# Altium PCB EECS430PhasedArray.PcbDoc (part 2 of 2)
Units mil, origin at the board's own origin, x right, y up, seen from the top; angles counter-clockwise.
Board outline 6900 x 8200 mil, 2 copper layers (Top Layer, Bottom Layer), stack 62.8 mil thick; 97 components, 54 nets, 335 pads, 174 vias.
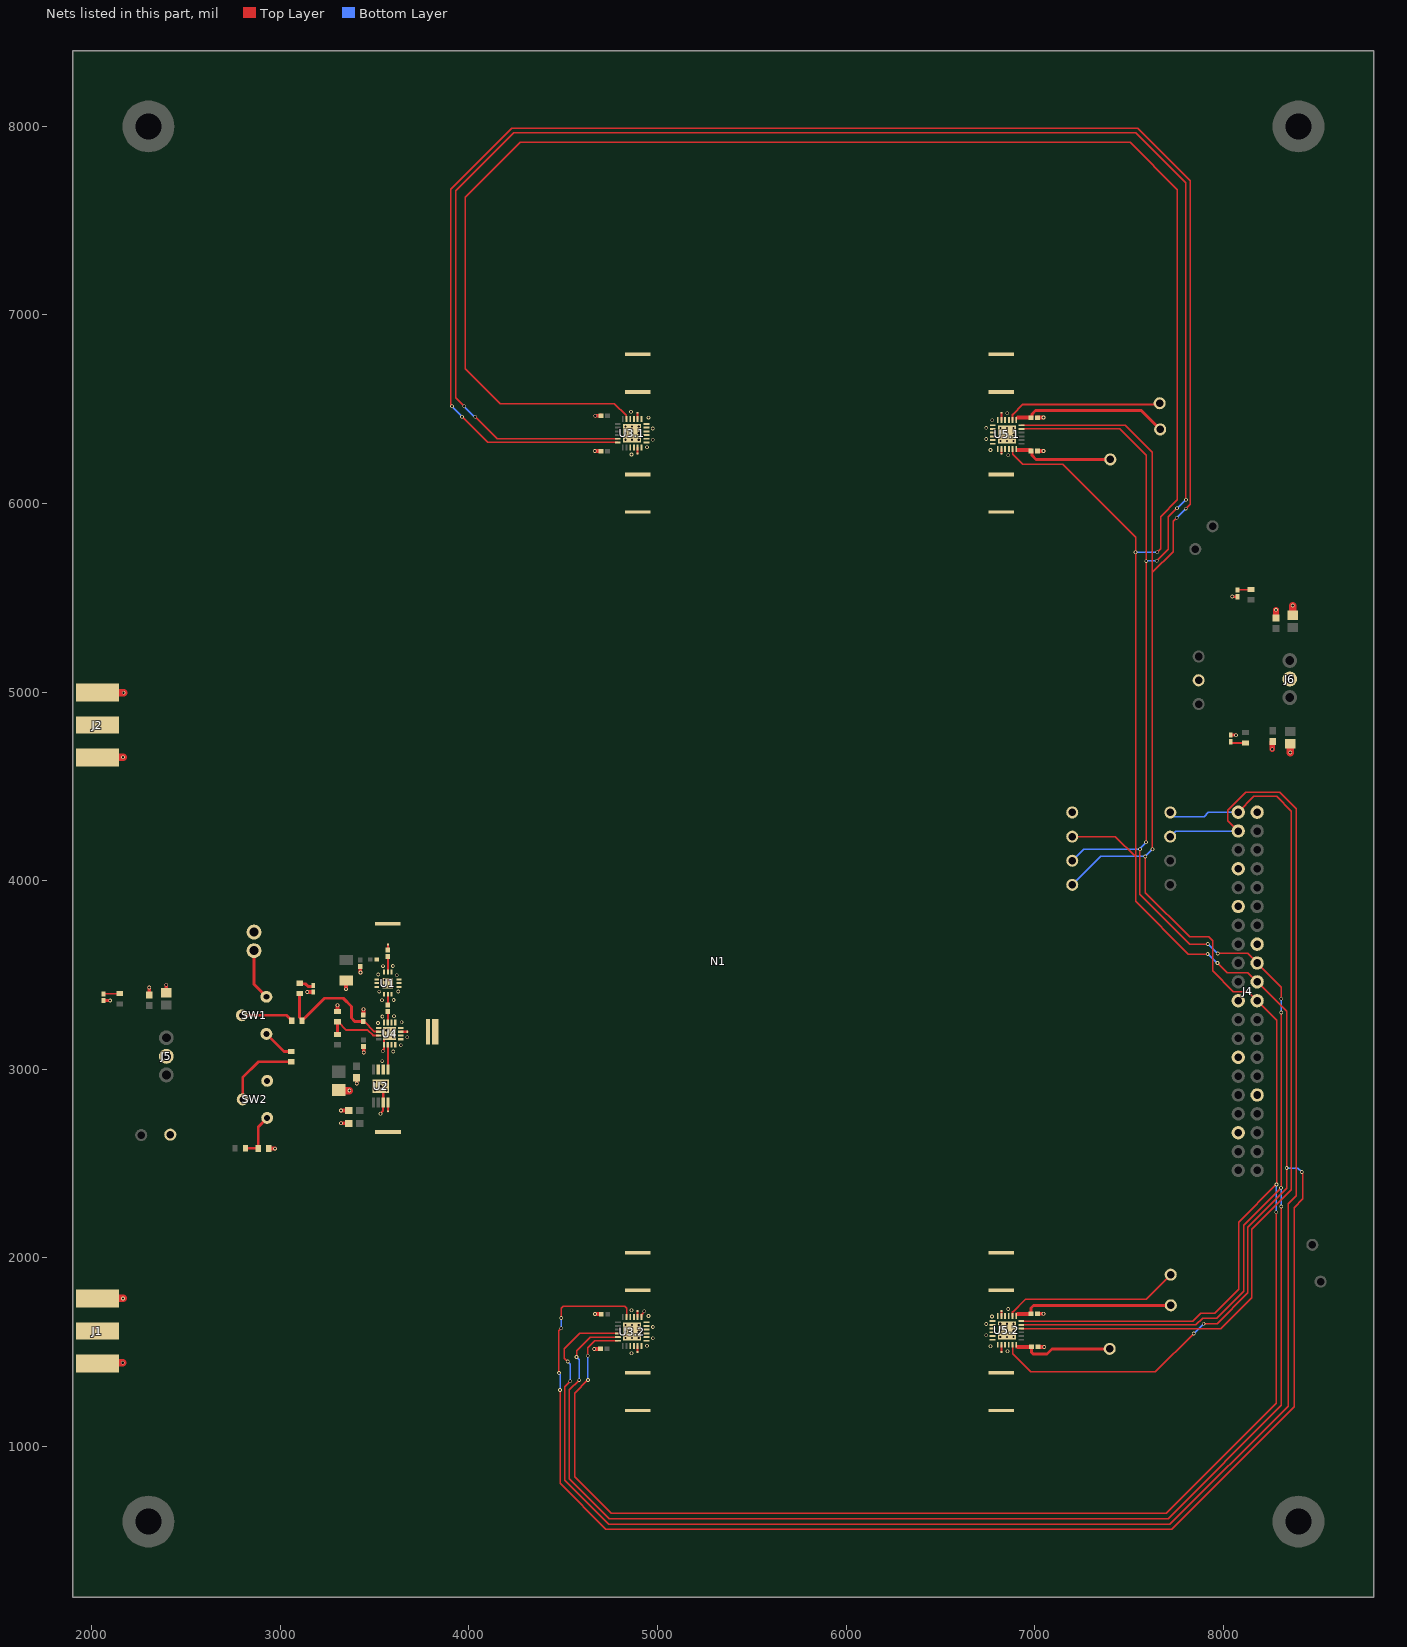
[diagram p2: the nets of this part, all layers, seen from the top]

## Via types
v1: diameter 19.68, hole 11.81, Top Layer to Bottom Layer, 174 vias

## Nets (pads, with @x,y where several pads share a name; then routed paths per layer and width w, separated by ;. In a path a pad name is that pad's centre, name@x,y a point inside that pad or via, vN(x,y) a via of type N, cw(c..) or ccw(c..) an arc to the next point about the centre after c; other vN are vias at no path point) (continued)
CS3: CS3.1 J4.38 U3.2.22 | length 9364.6
  Top Layer w7: v1(4523.86,1448.9) 4505.16,1467.6 4505.16,1516.81 4586.85,1598.5 U3.2.22@4789.61,1598.5 ; v1(4537.64,1344.57) 4509.64,1316.56 4509.64,818.67 4742.56,585.75 7717.52,585.75 8344.88,1213.11 8344.88,2287.2 8387.01,2329.33 8387.01,4382.09 8299.57,4469.53 8121.17,4469.53 8024.96,4373.32 8024.96,4318.15 J4.38@8080.47,4262.64
  Bottom Layer w7: v1(4523.86,1448.9) 4537.64,1435.12 v1(4537.64,1344.57) ; CS3.1@7719.37,4233.06 7748.95,4262.64 J4.38@8080.47,4262.64
CS4: CS4.1 J4.40 U5.2.22 | length 4685.3
  Top Layer w7: U5.2.22@6929.49,1623.73 7988.73,1623.73 8152.56,1787.56 8152.56,2150.28 8362.56,2360.28 8362.56,4367.17 8283.82,4445.91 8163.74,4445.91 J4.40@8080.47,4362.64
  Bottom Layer w7: CS4.1@7720.51,4361.26 7742.32,4339.45 7898.77,4339.45 7921.95,4362.64 J4.40@8080.47,4362.64
GND: C1.2 C2.2 C3.2 C4.2 C5.2 C6.2 C9.2 C10.2 C11.2 C12.2 C13.1.2 C13.2.2 C14.1.2 C14.2.2 C15.2 C16.2 C17.1.2 C17.2.2 C18.1.2 C18.2.2 C19.2 C20.2 D1.1 D2.1 D3.1 D4.1 GND.1 J1.2 J1.3 J2.2 J2.3 J3.2 J4.6 J4.9 J4.14 J4.20 J4.25 J4.30 J4.34 J4.39 J5.2 J6.2 R4.1 R6.1 SW2.2 U1.1 U1.3 U1.4 U1.5 U1.6 U1.7 U1.9 U1.10 U1.11 U1.12 U1.13 U2.3 U2.6 U2.7 U2.9 U3.1.3 U3.1.4 U3.1.6 U3.1.7 U3.1.8 U3.1.9 U3.1.10 U3.1.11 U3.1.12 U3.1.13 U3.1.15 U3.1.16 U3.1.25 U3.2.3 U3.2.4 U3.2.6 U3.2.7 U3.2.8 U3.2.9 U3.2.10 U3.2.11 U3.2.12 U3.2.13 U3.2.15 U3.2.16 U3.2.25 U4.1 U4.3 U4.4 U4.5 U4.6 U4.8 U4.9 U4.10 U4.12 U4.13 U4.17 U5.1.3 U5.1.4 U5.1.6 U5.1.7 U5.1.8 U5.1.9 U5.1.10 U5.1.11 U5.1.12 U5.1.13 U5.1.15 U5.1.16 U5.1.25 U5.2.3 U5.2.4 U5.2.6 U5.2.7 U5.2.8 U5.2.9 U5.2.10 U5.2.11 U5.2.12 U5.2.13 U5.2.15 U5.2.16 U5.2.25 | length 1854.4
  Top Layer w10: U3.2.13@4914.61,1684.13 4914.61,1694.8 4915.59,1695.79 4915.59,1698.16 4929.96,1712.53 v1(4929.96,1715.15)
  Top Layer w11: v1@3529.08,2763.31 v1(3531.08,2763.31) 3531.08,2765.66 3544.08,2778.66 3544.08,2820.72 U2.3@3545.38,2822.02 ; v1(3543.08,3095.31) 3543.08,3097.66 3549.94,3104.52 3549.94,3128.73 3550.75,3129.55 3550.75,3159.07 3550.92,3159.25 v1(3561.87,3170.2)
  Top Layer w15: D1.1@2062.36,3363.23 2062.9,3363.77 2096.54,3363.77 v1(2097.08,3364.31) ; v1(3532.59,2909.62) 3545.38,2896.83 U2.3@3545.38,2822.02 ; D2.1@8040.08,4772.02 8040.44,4771.67 8067.72,4771.67 v1(8068.08,4771.31) ; v1(8048.08,5506.31) 8048.75,5505.63 8075.47,5505.63 D3.1@8076.14,5504.96
  Top Layer w20: v1(2304.08,3433.31) 2304.49,3432.9 C20.2@2304.49,3393.82 ; C19.2@2395.04,3404.6 2395.08,3404.64 v1(2395.08,3447.31) ; R4.1@2938.08,2579.31 2939.08,2578.31 v1(2971.08,2578.31) ; v1(3143,3409) 3173.84,3409 3174,3408.84 D4.1@3174,3408.28 ; R6.1@3302.89,3306.29 3303.08,3306.48 v1(3303.08,3338.31) ; v1(3321.08,2712.31) C12.2@3362.55,2712.31 ; v1(3321.08,2780.31) C10.2@3362.55,2780.31 ; v1(3348.08,3424.31) 3348.08,3468.17 C5.2@3350.08,3470.17 ; C11.2@3404.67,2955.05 3404.88,2954.84 v1(3404.88,2923.27) ; C6.2@3424.08,3544.98 3424.08,3513.31 v1(3425.08,3512.31) ; C16.2@3440.11,3287.21 3441.08,3288.18 v1(3441.08,3317.31) ; C15.2@3441.09,3119.69 3442.08,3118.7 v1(3442.08,3088.31) ; v1(4664.96,1515.15) 4696.21,1515.15 C14.2.2@4697.87,1516.81 ; v1(4667.88,6278.02) 4698.91,6278.02 C14.1.2@4699.76,6277.17 ; v1(4668.96,1701.15) 4701.53,1701.15 C13.2.2@4701.81,1700.87 ; v1(4669.88,6465.02) 4698.65,6465.02 C13.1.2@4699.76,6466.14 ; C17.1.2@7015.51,6278.15 7018.19,6278.15 7018.5,6277.83 7047.91,6277.83 v1(7048,6277.74) ; C18.1.2@7015.51,6455.31 7015.94,6455.74 v1(7048,6455.74) ; C18.2.2@7015.59,1701.85 7015.89,1702.15 v1(7046.96,1702.15) ; C17.2.2@7018.94,1526.65 7021.81,1526.65 7021.93,1526.54 7050.72,1526.54 v1(7051,1526.26)
  Top Layer w30: v1(8261.15,4696.79) 8261.15,4735.17 C2.2@8263.15,4737.17 ; C4.2@8280.23,5393.27 v1(8280.23,5435.65)
  Top Layer w40: J1.3@2030.08,1438.31 2034.72,1442.95 v1(2163.74,1442.95) ; J1.2@2030.08,1783.31 2030.08,1783.5 v1(2165.71,1783.5) ; J2.3@2030.08,4652.03 2030.08,4653.58 v1(2165.71,4653.58) ; J2.2@2030.08,4997.03 2168.66,4997.03 v1(2168.66,4996.1) ; C9.2@3309.2,2889.11 3312,2886.31 v1(3366.08,2886.31) ; v1(8355.65,4678.88) 8355.65,4724.37 C1.2@8356.65,4725.37 ; C3.2@8369.33,5407.08 v1(8369.33,5458.57)
  other v1: 4862.44,1493.19 6856.96,1503.15 6765.98,1530.59 4944.13,1532.56 4830.39,1573.35 4865.39,1573.35 4900.39,1573.35 4975.71,1572.91 6818.7,1578.89 6853.7,1578.89 6888.7,1578.89 6743.27,1588.66 4830.39,1608.35 4865.39,1608.35 4900.39,1608.35 6818.7,1613.89 6853.7,1613.89 6888.7,1613.89 4975.71,1631.97 4830.39,1643.35 4865.39,1643.35 4900.39,1643.35 6743.27,1647.72 6818.7,1648.89 6853.7,1648.89 6888.7,1648.89 6774.84,1688.07 4952.99,1690.04 4862.44,1721.54 6860.96,1727.15 3502.59,2887.62 3562.59,2887.62 3502.59,2931.62 3562.59,2931.62 3540.71,3042.36 3599.08,3093.31 3639.13,3126.02 3672.6,3169.33 3597.87,3170.2 3561.87,3206.2 3597.87,3206.2 3518.07,3244.13 3643.07,3249.06 3541.08,3279.31 3602.72,3280.55 3538.74,3365.2 3600.75,3366.18 3525.06,3410.92 3625.35,3411.46 3553.53,3439.41 3586.53,3439.41 3553.53,3472.41 3586.53,3472.41 3617.48,3498.07 3519.06,3502.01 3544.65,3546.3 3596.81,3547.28 6860.88,6256.02 4862.88,6260.02 6766.48,6283.81 4944.06,6297.83 6819.04,6330.81 6854.04,6330.81 6889.04,6330.81 4830.31,6337.64 4865.31,6337.64 4900.31,6337.64 4975.63,6338.19 6743.77,6341.88 6819.04,6365.81 6854.04,6365.81 6889.04,6365.81 4830.31,6372.64 4865.31,6372.64 4900.31,6372.64 4975.63,6397.24 6743.77,6400.94 6819.04,6400.81 6854.04,6400.81 6889.04,6400.81 4830.31,6407.64 4865.31,6407.64 4900.31,6407.64 6775.34,6441.29 4952.91,6455.31 6854.88,6478.02 4859.88,6486.02
MISO: J4.21 MISO.1 U3.1.17 U3.2.17 U5.1.17 U5.2.17 | length 22229.2
  Top Layer w7: v1(4477.58,1388.88) 4477.58,1613.46 v1(4489.41,1625.3) ; v1(4483.5,1298.31) 4483.5,803.54 4726.63,560.41 7728.72,560.41 8376.38,1208.07 8376.38,2265.79 8423.07,2312.48 8423.07,2444.95 8416.69,2451.33 v1(8416.69,2454.76) ; v1(4489.41,1679.98) 4489.41,1730.39 4500.17,1741.15 4826.09,1741.15 4835.87,1731.38 U3.2.17@4835.87,1684.13 ; U3.1.17@4835.79,6448.43 4834.37,6449.85 4834.37,6466.92 4771.26,6530.02 4165.88,6530.02 3980.47,6715.43 3980.47,7623.62 4271.89,7915.04 7507.52,7915.04 7758.15,7664.41 7758.15,6018.66 7669.65,5930.16 7669.65,5760.51 v1(7650.59,5741.46) ; U5.2.17@6883.23,1538.1 6883.23,1490.12 6978.58,1394.76 7641.18,1394.76 v1(7844.02,1597.6) ; U5.1.17@6883.57,6290.02 6883.57,6261.98 6938.66,6206.89 7148.66,6206.89 7535.63,5819.92 v1(7535.63,5741.18) 7536.77,5740.04 7535.63,5738.9 7535.63,4126 ; MISO.1@7200,4233.2 7428.43,4233.2 7535.63,4126 ; v1(7896.67,1649.84) 7968.84,1649.84 8131.65,1812.65 8131.65,2161.85 8336.97,2367.17 v1(8336.97,2475.43) 8336.97,3306.14 J4.21@8180.47,3462.64 8132.04,3511.07 8021.8,3511.07 v1(7969.84,3563.03) ; v1(7918,3610) 7815.08,3610 7535.63,3889.45 7535.63,4126
  Bottom Layer w7: v1(4477.58,1388.88) 4477.58,1385.45 4483.35,1379.67 4483.35,1298.46 v1(4483.5,1298.31) ; v1(4489.41,1625.3) v1(4489.41,1679.98) ; v1(7535.63,5741.18) 7535.77,5741.32 7650.45,5741.32 v1(7650.59,5741.46) ; v1(7844.02,1597.6) 7844.43,1597.6 v1(7896.67,1649.84) ; v1(7918,3610) 7920.44,3610 7967.41,3563.03 v1(7969.84,3563.03) ; v1(8336.97,2475.43) 8396.02,2475.43 v1(8416.69,2454.76)
MOSI: J4.19 MOSI.1 U3.1.24 U3.2.24 U5.1.24 U5.2.24 | length 21900.4
  Top Layer w7: v1(3910.59,6515.14) 3910.59,6517.71 3902.72,6525.58 3902.72,7665.94 4227.6,7990.83 7547.87,7990.83 7826.14,7712.56 7826.14,5996.91 v1(7801.85,5972.61) ; v1(3963.74,6460.24) 4100.55,6323.43 U3.1.24@4789.53,6323.43 ; v1(4630.16,1479.41) 4630.16,1522.72 4666.57,1559.13 U3.2.24@4789.61,1559.13 ; v1(4631.14,1351.46) 4560.28,1280.59 4560.28,838.98 4755.5,643.76 7697.65,643.76 8281.89,1227.99 v1(8281.89,2241.3) ; U5.2.24@6929.49,1663.1 7839.6,1663.1 7881.5,1705 7957,1705 8083.46,1831.46 8083.46,2188.45 v1(8283.08,2388.07) ; U5.1.24@6929.83,6415.02 7480.49,6415.02 7625.13,6270.38 7625.13,5634.77 ; v1(7587.6,4128.11) 7587.6,3936.46 7823.19,3700.87 7924.13,3700.87 7944.25,3680.75 7944.25,3520.71 8053.5,3411.46 8131.65,3411.46 J4.19@8180.47,3362.64 8283.82,3259.29 v1@8283.82,2388.07 ; v1(7625.13,4165.99) 7625.13,5634.77 ; v1(7753.98,5924.09) 7735,5905.12 7735,5744.65 7625.13,5634.77
  Bottom Layer w7: v1(3910.59,6515.14) 3910.59,6514.26 3963.74,6461.11 v1(3963.74,6460.24) ; v1(4630.16,1479.41) 4630.65,1478.92 4630.65,1351.95 v1(4631.14,1351.46) ; MOSI.1@7200,3977.08 7351.03,4128.11 v1(7587.6,4128.11) 7587.6,4128.29 7625.13,4165.82 v1(7625.13,4165.99) ; v1(7753.98,5924.09) 7753.98,5924.42 7801.85,5972.29 v1(7801.85,5972.61) ; v1(8281.89,2241.3) 8283.08,2242.49 v1(8283.08,2388.07)
NetANT1_1: ANT1.1 N5.1.2
NetANT2_1: ANT2.1 N7.1.2
NetANT3_1: ANT3.1 N5.2.2
NetANT4_1: ANT4.1 N7.2.2
NetC7_1: C7.1 L1.1 U1.8 | length 82.4
  Top Layer w11: U1.8@3570.03,3514.97 3570.03,3597.26 C7.1@3570.08,3597.31
NetC7_2: C7.2 N2.1 | length 28.4
  Top Layer w11: C7.2@3570.08,3631.95 N2.1@3570.08,3660.31
NetC8_1: C8.1 U4.11 | length 58.8
  Top Layer w11: U4.11@3570.03,3247.25 3570.08,3247.25 C8.1@3570.08,3305.98
NetC8_2: C8.2 U1.2 | length 56.3
  Top Layer w11: U1.2@3570.03,3396.86 3570.03,3340.63 C8.2@3570.08,3340.63
NetC17.1_1: C17.1.1 TP1.1.1 U5.1.18 | length 523.8
  Top Layer w15: C17.1.1@6980.87,6278.15 6981.09,6278.15 6985.79,6273.44 6985.79,6256.06 7008.39,6233.46 TP1.1.1@7401.9,6233.46
  Top Layer w20: 6911.57,6284.06 6978.9,6284.06 6980.87,6282.09 C17.1.1@6980.87,6278.15
NetC17.2_1: C17.2.1 TP1.2.1 U5.2.18 | length 546.9
  Top Layer w10: U5.2.18@6902.91,1538.1 6902.99,1538.02 6902.99,1522.96 6903.8,1522.15
  Top Layer w15: C17.2.1@6984.29,1526.65 6984.29,1498.27 6993.08,1489.49 7066.42,1489.49 7093.11,1516.18 TP1.2.1@7398.58,1516.18 TP1.2.1@7397.6,1517.17
  Top Layer w20: 6912.46,1526.65 C17.2.1@6984.29,1526.65
NetC18.1_1: C18.1.1 TP4.1.1 U5.1.1 | length 835
  Top Layer w10: U5.1.1@6903.17,6456.83 6903.17,6441.68 U5.1.1@6903.25,6441.6
  Top Layer w15: C18.1.1@6980.87,6455.31 6981.65,6455.31 6986.36,6460.02 6986.36,6473.48 7005.63,6492.76 7566.1,6492.76 TP4.1.1@7666.38,6392.48
  Top Layer w20: 6911.57,6455.31 C18.1.1@6980.87,6455.31
NetC18.2_1: C18.2.1 TP4.2.1 U5.2.1 | length 865
  Top Layer w10: U5.2.1@6902.91,1689.67 6902.99,1689.75 6902.99,1703.99 U5.2.1@6904.23,1705.23
  Top Layer w15: C18.2.1@6980.94,1701.85 6980.94,1732.76 6994.33,1746.14 7721.73,1746.14 TP4.2.1@7722.72,1747.13
  Top Layer w20: 6910.67,1701.85 C18.2.1@6980.94,1701.85
NetD1_2: D1.2 R7.1 | length 87.4
  Top Layer w10: D1.2@2062.36,3398.66 2063.35,3399.65 2147.99,3399.65 R7.1@2148.98,3400.63
NetD2_2: D2.2 R8.1 | length 83
  Top Layer w10: D2.2@8040.08,4736.59 8040.08,4734.59 8044.92,4729.75 R8.1@8119.08,4729.75
NetD3_2: D3.2 R9.2 | length 73.5
  Top Layer w10: D3.2@8076.14,5540.39 8078.11,5542.36 8146.02,5542.36 R9.2@8147.99,5544.33
NetD4_2: D4.2 R10.1 | length 84.4
  Top Layer w15: R10.1@3102,3455.56 3104.94,3452.62 3132.38,3452.62 3147.56,3437.44 3171.66,3437.44 3174,3439.78 D4.2@3174,3443.72
NetJ1_1: J1.1 N3.2
NetJ2_1: J2.1 N2.2
NetJ3_1: J3.1 SW1.2 | length 271.9
  Top Layer w15: J3.1@2860.08,3628.31 2860.08,3449.69 SW1.2@2926.04,3383.73
NetN1_1: N1.1 N6.2
NetN1_2: N1.2 N4.1.2
NetN1_3: N1.3 N8.1.2
NetN1_4: N1.4 N4.2.2
NetN1_5: N1.5 N8.2.2
NetN3_1: N3.1 U2.4 | length 45.8
  Top Layer w11: U2.4@3570.97,2822.02 3570.97,2776.31 N3.1@3571.08,2776.31
NetN4.1_1: N4.1.1 U3.1.5 | length 32.8
  Top Layer w10: N4.1.1@4894.72,6264.09 4894.72,6286.06 4894.84,6286.18 U3.1.5@4894.84,6296.85
NetN4.2_1: N4.2.1 U3.2.5 | length 32.8
  Top Layer w10: N4.2.1@4894.79,1499.79 4894.79,1521.76 4894.92,1521.89 U3.2.5@4894.92,1532.56
NetN5.1_1: N5.1.1 U3.1.14 | length 32.5
  Top Layer w10: N5.1.1@4894.72,6480.91 4894.72,6459.21 4894.84,6459.09 U3.1.14@4894.84,6448.43
NetN5.2_1: N5.2.1 U3.2.14 | length 34.5
  Top Layer w10: N5.2.1@4894.79,1718.58 N5.2.1@4894.79,1716.61 4894.79,1715.01 4894.92,1714.88 U3.2.14@4894.92,1684.13
NetN6_1: N6.1 U4.7 | length 34.1
  Top Layer w11: U4.7@3638.92,3198.04 N6.1@3672.97,3198.03
NetN7.1_1: N7.1.1 U5.1.5 | length 39.6
  Top Layer w10: N7.1.1@6823.86,6480.91 6823.86,6452.91 6824.51,6452.27 U5.1.5@6824.51,6441.6
NetN7.2_1: N7.2.1 U5.2.5 | length 27
  Top Layer w10: N7.2.1@6823.94,1716.61 6823.94,1700.57 6824.17,1700.34 U5.2.5@6824.17,1689.67
NetN8.1_1: N8.1.1 U5.1.14 | length 26.2
  Top Layer w10: N8.1.1@6823.87,6264.09 6823.87,6278.63 6824.51,6279.28 U5.1.14@6824.51,6290.02
NetN8.2_1: N8.2.1 U5.2.14 | length 38.4
  Top Layer w10: N8.2.1@6823.92,1499.8 6823.92,1527.18 6824.17,1527.43 U5.2.14@6824.17,1538.1
NetR1_1: R1.1 R4.2 SW2.1 | length 249.4
  Top Layer w15: R1.1@2815.08,2580.31 2815.58,2579.81 2882.46,2579.81 R4.2@2882.96,2579.31 2882.96,2693.8 SW2.1@2930.04,2740.88
NetR2_1: R2.1 SW1.1 | length 169.6
  Top Layer w15: SW1.1@2926.04,3186.88 3019.05,3093.87 R2.1@3057.08,3093.87
NetR2_2: R2.2 SW2.3 | length 407.5
  Top Layer w15: SW2.3@2800.12,2839.31 2800.12,2955.35 2883.52,3038.75 R2.2@3057.08,3038.75
NetR3_1: C16.1 R3.1 R10.2 U4.14 | length 712
  Top Layer w10: C16.1@3440.11,3252.57 3444.82,3252.57 3498.44,3198.94 3519.91,3198.94 U4.14@3520.81,3198.04
  Top Layer w15: R10.2@3102,3400.44 3102,3274.5 R3.1@3115.56,3260.94 ; R3.1@3115.56,3257 R3.1@3115.56,3260.94 ; C16.1@3440.11,3252.57 3394.82,3252.57 3377.08,3270.31 3377.08,3332.31 3333.39,3376 3234.56,3376 3125.78,3267.22 3121.84,3267.22 R3.1@3115.56,3260.94
NetR3_2: R3.2 SW1.3 | length 278.4
  Top Layer w15: SW1.3@2796.12,3285.31 3032.13,3285.31 3050.22,3267.22 3054.16,3267.22 3060.44,3260.94 R3.2@3060.44,3257
NetR5_1: R5.1 R6.2 U4.15 | length 315
  Top Layer w10: R6.2@3302.89,3251.17 3306.83,3251.17 3350.69,3207.31 3463.08,3207.31 3492.03,3178.35 U4.15@3520.81,3178.35
  Top Layer w15: R5.1@3302.89,3184.25 R6.2@3302.89,3251.17
NetTP5.1_1: TP5.1.1 U5.1.2 | length 832.5
  Top Layer w10: U5.1.2@6883.57,6441.6 6883.57,6471.6 6937.6,6525.63 TP5.1.1@7663.66,6525.63
NetTP5.2_1: TP5.2.1 U5.2.2 | length 942.6
  Top Layer w10: U5.2.2@6883.23,1689.67 6883.31,1689.75 6883.31,1710.91 6952.01,1779.61 7592.09,1779.61 TP5.2.1@7722.24,1909.76
NetU2_5: U2.5 U4.2 | length 132.9
  Top Layer w11: U4.2@3570.03,3129.14 3570.03,2997.22 U2.5@3570.97,2997.22
SCK: J4.23 SCK.1 U3.1.23 U3.2.23 U5.1.23 U5.2.23 | length 21854.8
  Top Layer w7: v1(3974.88,6515.14) 3930.28,6559.74 3930.28,7658.07 4237.44,7965.24 7538.03,7965.24 7802.8,7700.47 v1(7802.8,6019.84) ; v1(4033.88,6460.02) 4150.8,6343.11 U3.1.23@4789.53,6343.11 ; v1(4571.1,1473.48) 4571.1,1505.98 4643.94,1578.82 U3.2.23@4789.61,1578.82 ; v1(4584.88,1350.47) 4532.98,1298.57 4532.98,827.61 4744.09,616.5 7708.19,616.5 8308.11,1216.42 v1(8308.11,2271.14) ; U5.2.23@6929.49,1643.41 7855.34,1643.41 7890.93,1679 7967,1679 8108.7,1820.7 8108.7,2172.36 v1(8307.44,2371.1) 8307.44,3299.25 v1(8308.43,3300.24) ; U5.1.23@6929.83,6395.34 7453.03,6395.34 7592.17,6256.2 v1(7592.17,5694.25) 7591.48,5693.56 7591.48,4204.23 v1(7590.79,4203.54) ; v1(7558.97,4166.13) 7558.97,3926.89 7822.32,3663.54 v1(7918.54,3663.54) ; v1(7648.5,5695.71) 7709.02,5756.22 7709.02,5928.81 v1(7755.16,5974.96) ; v1(7971.81,3613.23) 8129.88,3613.23 J4.23@8180.47,3562.64 8308.43,3434.68 v1(8308.43,3373.07)
  Bottom Layer w7: v1(3974.88,6515.14) 3974.88,6514.17 4024.07,6464.98 4025.49,6464.98 4030.45,6460.02 v1(4033.88,6460.02) ; v1(4571.1,1473.48) 4571.1,1472.27 4584.88,1458.49 v1(4584.88,1350.47) ; SCK.1@7200,4105.14 7260.98,4166.13 v1(7558.97,4166.13) 7558.97,4168.93 7590.79,4200.74 v1(7590.79,4203.54) ; v1(7592.17,5694.25) 7592.89,5694.98 7647.78,5694.98 v1(7648.5,5695.71) ; v1(7755.16,5974.96) 7756.54,5974.96 7801.42,6019.84 v1(7802.8,6019.84) ; v1(7918.54,3663.54) 7920.02,3663.54 7970.33,3613.23 v1(7971.81,3613.23) ; v1(8307.44,2371.1) 8307.78,2370.77 8307.78,2271.48 v1(8308.11,2271.14) ; v1(8308.43,3300.24) v1(8308.43,3373.07)
pads on no net: J4.1 J4.2 J4.3 J4.4 J4.5 J4.7 J4.8 J4.10 J4.11 J4.12 J4.13 J4.15 J4.16 J4.17 J4.18 J4.22 J4.24 J4.26 J4.27 J4.28 J4.29 J4.31 J4.33 J4.35 J4.37 J5.3 MH1.1 MH2.1 MH3.1 MH4.1 U3.1.19 U3.1.20 U3.1.21 U3.2.19 U3.2.20 U3.2.21 U5.1.19 U5.1.20 U5.1.21 U5.2.19 U5.2.20 U5.2.21

## Polygon pours and split planes (outlines as drawn)
GND on Top Layer "NONET_L-01_P-001" (solid, pour order 39): 3506.26,3211.65 3506.26,3248.07 3525.94,3267.76 3525.94,3284.49 3533.82,3292.36 3543.66,3292.36 3555.47,3280.55 3555.47,3222.48 3584.02,3222.48 3584.02,3278.58 3596.81,3291.38 3609.61,3291.38 3637.17,3263.82 3644.05,3263.82 3654.88,3252.99 3654.88,3211.65 3614.53,3211.65 3614.53,3184.09 3669.65,3184.09 3682.44,3171.3 3682.44,3159.49 3609.61,3086.65 3589.92,3086.65 3584.02,3092.56 3584.02,3154.57 3545.63,3154.57 3545.63,3211.65
GND on Top Layer "Top Layer-GND" (solid, pour order 37): 6868.35,1722.52 6863.43,1727.44 6849.65,1727.44 6838.82,1716.61 6838.82,1661.5 6810.28,1661.5 6810.28,1705.79 6753.19,1705.79 6735.47,1688.07 6735.47,1513.86 6744.33,1505 6799.45,1505 6811.26,1516.81 6811.26,1555.2 6810.28,1555.2 6810.28,1564.06 6838.82,1564.06 6838.82,1509.92 6849.65,1499.09 6863.43,1499.09 6868.35,1504.02 6868.35,1569.96 6810.28,1569.96 6810.28,1657.56 6868.35,1657.56
GND on Top Layer "Top Layer-GND 1" (solid, pour order 36): 6868.78,6475.83 6863.86,6480.75 6850.08,6480.75 6839.26,6469.92 6839.26,6414.8 6810.71,6414.8 6810.71,6459.1 6753.63,6459.1 6735.91,6441.38 6735.91,6267.17 6744.77,6258.31 6799.89,6258.31 6811.7,6270.12 6811.7,6308.51 6810.71,6308.51 6810.71,6317.36 6839.26,6317.36 6839.26,6263.23 6850.08,6252.4 6863.86,6252.4 6868.78,6257.32 6868.78,6321.3 6839.26,6321.3 6839.26,6321.19 6810.71,6321.19 6810.71,6409.88 6868.78,6409.88
GND on Top Layer "Top Layer-GND 2" (solid, pour order 35): 4850.63,1498.11 4855.55,1493.19 4869.33,1493.19 4880.16,1504.02 4880.16,1559.13 4908.7,1559.13 4908.7,1514.84 4965.79,1514.84 4983.5,1532.56 4983.5,1706.77 4974.65,1715.63 4919.53,1715.63 4907.72,1703.82 4907.72,1665.43 4908.7,1665.43 4908.7,1656.57 4880.16,1656.57 4880.16,1710.71 4869.33,1721.54 4855.55,1721.54 4850.63,1716.61 4850.63,1652.64 4880.16,1652.64 4880.16,1652.75 4908.7,1652.75 4908.7,1564.06 4850.63,1564.06
GND on Top Layer "Top Layer-GND 3" (solid, pour order 34): 4850.55,6263.39 4855.47,6258.46 4869.25,6258.46 4880.08,6269.29 4880.08,6324.41 4908.62,6324.41 4908.62,6280.12 4965.71,6280.12 4983.43,6297.83 4983.43,6472.05 4974.57,6480.91 4919.45,6480.91 4907.64,6469.09 4907.64,6430.71 4908.62,6430.71 4908.62,6421.85 4880.08,6421.85 4880.08,6475.98 4869.25,6486.81 4855.47,6486.81 4850.55,6481.89 4850.55,6416.93 4880.08,6416.93 4908.62,6416.93 4908.62,6328.35 4850.55,6328.35
NetJ2_1 on Top Layer "NONET_L-01_P-001" (solid, pour order 25): 3502.09,3774.65 3502.09,4757.24 1915.71,4757.24 1915.71,4893.35 3638.19,4893.35 3638.19,3774.65
NetJ1_1 on Top Layer "NONET_L-01_P-001" (solid, pour order 24): 3503.03,2661.46 3503.03,1678.86 1915.71,1678.86 1915.71,1542.76 3639.13,1542.76 3639.13,2661.46
NetN1_1 on Top Layer "NONET_L-01_P-001" (solid, pour order 12): 3773.36,3266.06 3805.01,3266.47 3817.82,3266.47 3817.82,3130.39 3793,3129.98 3773.36,3129.98 3773.36,3129.99
NetN1_5 on Top Layer "NETN1_5_L01_P009" (solid, pour order 9): 6755.96,1195.15 6891.64,1195.15 6891.64,1382.94 6755.97,1382.94
NetANT4_1 on Top Layer "NETANT4_1_L01_P008" (solid, pour order 8): 6756.1,1832.95 6891.79,1832.95 6891.78,2020.75 6756.11,2020.75
NetANT2_1 on Top Layer "NETANT2_1_L01_P006" (solid, pour order 6): 6756.02,6597.24 6891.71,6597.24 6891.71,6785.04 6756.03,6785.04
NetN1_3 on Top Layer "NETN1_3_L01_P005" (solid, pour order 5): 6756.02,5959.45 6891.71,5959.45 6891.71,6147.24 6756.03,6147.24
NetANT1_1 on Top Layer "NETANT1_1_L01_P004" (solid, pour order 4): 4826.89,6597.24 4962.57,6597.24 4962.57,6785.04 4826.9,6785.04
NetN1_2 on Top Layer "NETN1_2_L01_P003" (solid, pour order 3): 4826.89,5959.45 4962.57,5959.45 4962.57,6147.24 4826.9,6147.24
NetANT3_1 on Top Layer "NETANT3_1_L01_P002" (solid, pour order 2): 4826.96,1832.95 4962.64,1832.95 4962.64,2020.75 4826.97,2020.75
NetN1_4 on Top Layer "NETN1_4_L01_P001" (solid, pour order 1): 4826.96,1195.15 4962.64,1195.15 4962.64,1382.94 4826.97,1382.94
5V on Top Layer "Top Layer-5V" (solid, pour order 21): 3520.08,3133.31 3530.08,3143.31 3530.08,3166.31 3487.08,3166.31 3460.08,3193.31 3380.08,3193.31 3330.08,3143.31 3180.08,3143.31 3140.08,3103.31 3140.08,2921.31 3190.08,2871.31 3274.08,2955.31 3336.08,2955.31 3376.08,2995.31 3433.08,2995.31 3456.08,2972.31 3503.08,2972.31 3503.08,3116.31
5V on Top Layer "NONET_L-01_P-001" (solid, pour order 43): 2585,3132.91 2282.83,3132.91 2282.83,3358.31 2585,3358.31
5VP_PS on Top Layer "NONET_L-01_P-001" (solid, pour order 42): 8401.93,4775.63 8401.93,5005.94 8240.51,5005.94 8240.51,4775.63
5VN_PS on Top Layer "NONET_L-01_P-001" (solid, pour order 41): 8414.72,5126.02 8414.72,5356.34 8253.31,5356.34 8253.31,5126.02
GND on Top Layer "NONET_L-01_P-001" (solid, pour order 40): 3510.2,2943.94 3510.2,3035.47 3529.88,3055.16 3547.6,3055.16 3554.49,3048.27 3554.49,2943.94
GND on Top Layer "NONET_L-01_P-001" (solid, pour order 38): 3585,3485.28 3585,3551.22 3591.89,3558.11 3607.64,3558.11 3620.43,3545.32 3620.43,3512.83 3643.07,3490.2 3643.07,3387.83 3610.59,3355.35 3596.81,3355.35 3585.98,3366.18 3585.98,3428.19 3555.47,3428.19 3555.47,3365.2 3544.65,3354.37 3530.87,3354.37 3522.01,3363.23 3522.01,3398.66 3498.39,3422.28 3498.39,3501.02 3532.83,3535.47 3532.83,3550.24 3540.71,3558.11 3552.52,3558.11 3555.47,3555.16 3555.47,3485.28
NetC7_1 on Top Layer "NONET_L-01_P-001" (solid, pour order 23): 3515.08,3591.54 3522.99,3599.45 3582.08,3599.45 3582.08,3574.31 3575.08,3567.31 3575.08,3559.31 3565.08,3549.31 3565.08,3559.33 3554.49,3569.92 3518.46,3569.92 3515.08,3573.31
5V on Top Layer "NONET_L-01_P-001" (solid, pour order 22): 3413.08,3565.31 3484.08,3565.31 3489.08,3570.31 3489.08,3600.31 3382.08,3707.31 3338.08,3707.31 3296.08,3665.31 3296.08,3556.68 3299.57,3553.19 3400.96,3553.19
5V on Top Layer "NONET_L-01_P-001" (solid, pour order 15): 3486.13,2840.18 3449.26,2803.31 3410.08,2803.31 3400.08,2793.31 3400.08,2693.31 3370.08,2663.31 3240.08,2663.31 3190.08,2613.31 3190.08,2499.31 3298.08,2607.31 3399.94,2607.31 3476.73,2684.09 3476.73,2735.96 3524.08,2783.31 3531.08,2790.31 3531.08,2843.31 3490.08,2843.31
GND on Bottom Layer "NONET_L-01_P-001" (solid, pour order 45): 1900,8400 8800,8400 8800,200 1900,200

## Silkscreen, mask and mechanical layers (free items; w line width, h text height)
Top Overlay:
  lines w10: 2240.51,1462.64 2386.18,1462.64 ; 2328.07,4710.71 2304.49,4685.08 ; 2329.09,4659.49 2304.49,4684.09 2304.49,4685.08 ; 2361.57,1488.23 2386.18,1463.62 2386.18,1462.64 ; 2362.6,1437.01 2386.18,1462.64 ; 2450.16,4685.08 2304.49,4685.08 ; 3840.16,3903.94 3981.89,3904.43 3982.7,3673.13 3840.97,3672.64 3840.16,3903.94 ; 3842.13,3622.44 3983.86,3622.94 3984.67,3391.64 3842.94,3391.14 3842.13,3622.44 ; 3861.51,3811.58 3957.97,3811.91 3958.09,3775.5 3861.64,3775.16 3861.51,3811.58 ; 3865.58,3524.18 3962.03,3524.51 3962.16,3488.09 3865.7,3487.76 3865.58,3524.18
  text "-5V" at 7980.83,5142.91 h60
  text "GND" at 7983.78,5040.55 h60
  text "+5V" at 7982.8,4934.25 h60
  text "University of Michigan / EECS 430 W24 / 5.8 GHz Phased Array Antenna / Nathaniel Kalantar / Ryan Strohman / Hyunmin Choi" at 4000,4500 h60
  text "RX" at 2007.4,4487.4 h60
  text "Ext. TX/RX" at 4074.3,3823 h60
  text "GND" at 2482.05,3703 h60
  text "Manual (Enable SW2)" at 4077.25,3698 h60
  text "TX/RX" at 2363.09,3597 h60
  text "RX Select" at 4073.31,3543.47 h60
  text "TX Select" at 4075.28,3398.79 h60
  text "+5V" at 2016.26,3138.98 h60
  text "GND" at 2016.26,3036.61 h60
  text "NC" at 2073.35,2930.32 h60
  text "TX" at 2033.08,1858.31 h60
Bottom Overlay:
  lines w8: 7448,6177 7829,5831 7737,6518 ; 7477,1519 8427,2022 7799,1926 ; 7705,6334 7912,5942 ; 7791,1758 8448,1871
  text "JLCJLCJLCJLC" at 7692,508 h40
Mechanical 1:
  the board outline again, w8

## Dimensions
4500.93,1927.13 to 1900,200 on Mechanical 1
7218.97,2264.89 to 8800,200 on Mechanical 1
5365.27,817.99 to 1900,200 on Mechanical 1
4894.84,7227.97 to 1900,8400 on Mechanical 1
8800,8400 to 8800,200 on Mechanical 1
1900,8400 to 8800,8400 on Mechanical 1
4889.37,1510.73 to 4900.26,1497.82 on Mechanical 1
4500.89,2439.07 to 3639.12,2412.57 on Mechanical 1
4788.92,7227.68 to 4271.89,7915.04 on Mechanical 1
4894.92,2463.68 to 4501.22,1912.5 on Mechanical 1
4968,1399.26 to 4900.26,1497.82 on Mechanical 1
4900.35,1718.58 to 4900.39,1497.78 on Mechanical 1
4965.52,1181.88 to 4968,1399.26 on Mechanical 1
4962.98,2031.16 to 4962.88,1817.07 on Mechanical 1
4894.92,2463.68 to 4833.67,3130.35 on Mechanical 1